# EAGLE board brd2sensores_ligabot (EAGLE 7.1.0)
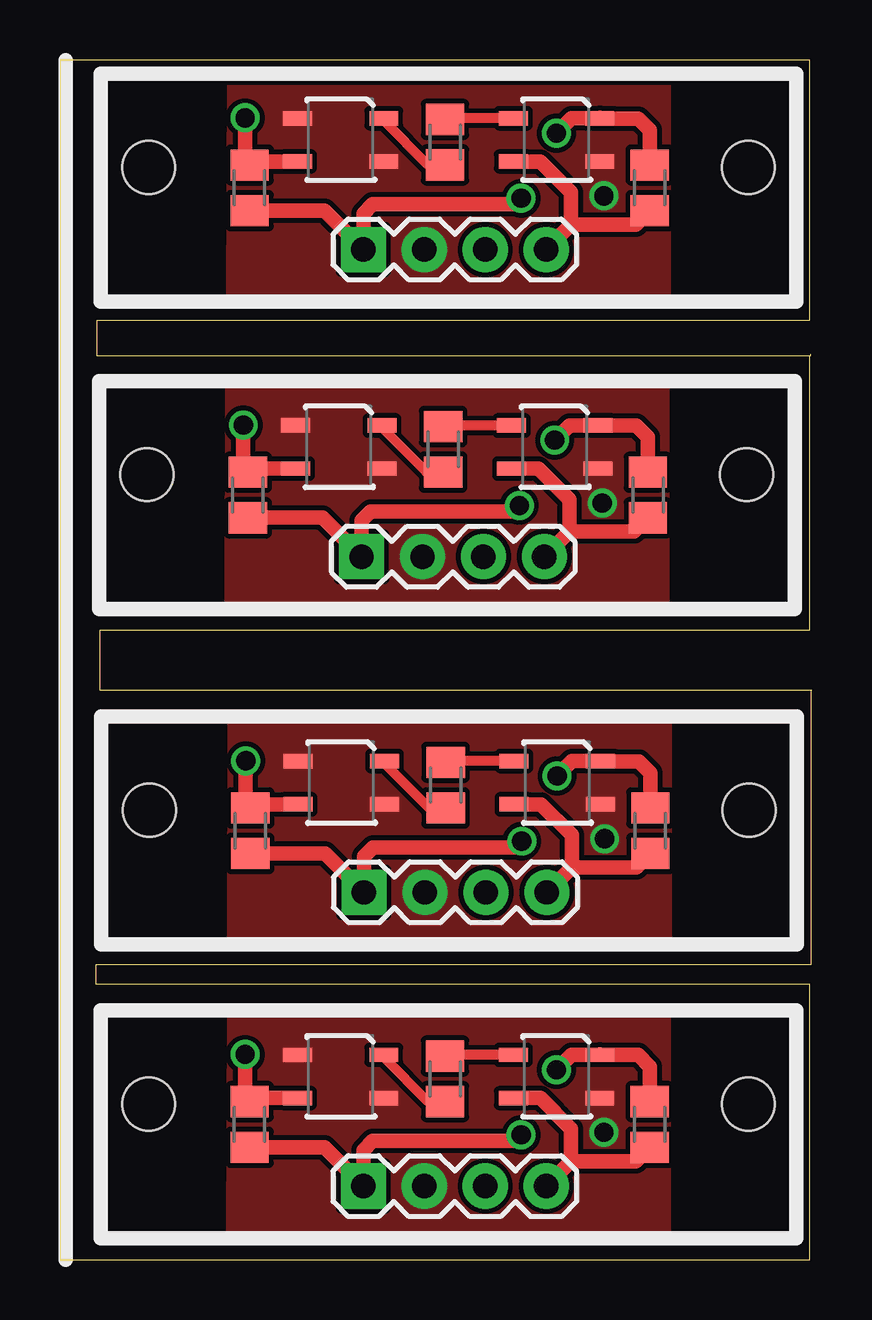
[diagram p0: board, top side]
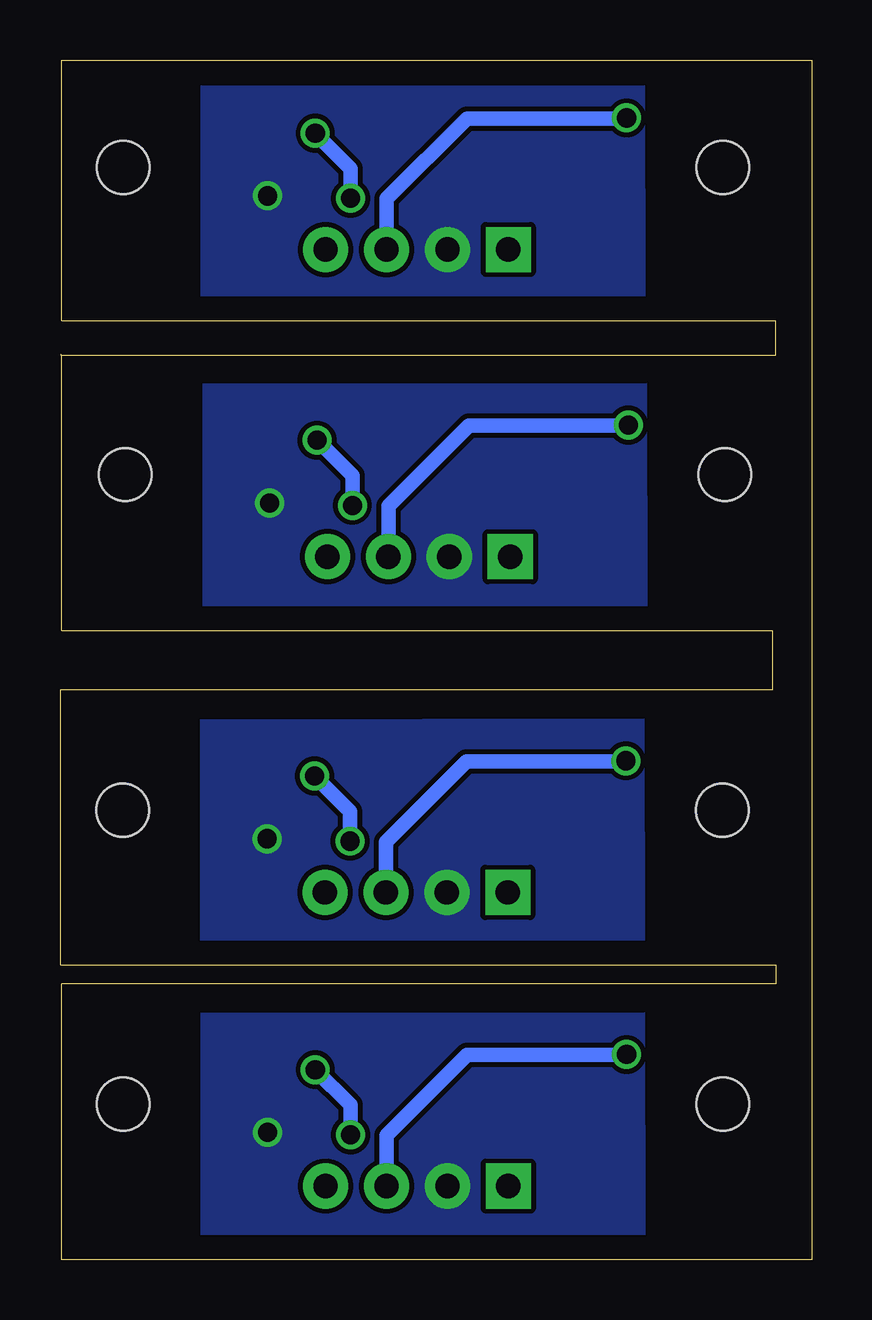
[diagram p1: board, bottom side, seen from below]

Size 31.34 x 50.01 mm. Coordinates in mm from the lower left corner, seen from the top.
Outline: 31.27,0 0,0 0,50 31.27,50
Outline: 31.27,0 31.27,0
Outline: 31.27,37.69 1.52,37.69 1.52,39.14 31.27,39.14 31.27,50.01
Outline: 31.27,37.69 31.29,37.69 31.29,37.74
Outline: 31.32,23.75 1.65,23.75 1.65,26.24 31.27,26.24 31.27,37.69
Outline: 31.32,23.75 31.34,23.75
Outline: 31.27,0 31.27,11.51 1.5,11.51 1.5,12.29 31.32,12.29 31.32,23.75
Copper layers (1*16): Top 0.035mm / dielectric 1.5mm / Bottom 0.035mm
Design rules "default": minimum track width 10mil, minimum drill 24mil, track to track 8mil, track to pad 8mil, pad to pad 8mil, via to via 8mil, smd to smd 8mil, copper to edge 40mil, drill to drill 8mil, minimum pad ring 10mil, minimum via ring 8mil, stop-mask expansion 4mil, vias tented up to drill 0mil, thermal gap 10mil
Holes 2.2 mm at 3.7,6.5 28.7,6.5 3.73,18.74 28.73,18.74 3.7,45.53 28.7,45.53 3.63,32.73 28.63,32.73

## Footprints (pad centres in the part's own frame; a part is rotated, then mirrored left to right if it is on the bottom)
1X04 = drill 1.016 pad 1.88 square: 1 0,0 | drill 1.016 pad 1.88: 2 2.54,0; 3 5.08,0; 4 7.62,0
M0805 = smd 1.3 x 1.6: 1 -0.95,0; 2 0.95,0
QRE1113 = smd 1.2 x 0.6: 1 -1.8,-0.9; 2 1.8,-0.9; 3 1.8,0.9; 4 -1.8,0.9

## Placement (x,y rotation side)
JP2  [1X04]  12.65,3.07 0 top
JP5  [1X04]  12.67,15.32 0 top
JP6  [1X04]  12.65,42.11 0 top
JP7  [1X04]  12.57,29.31 0 top
R6  [M0805]  24.59,5.64 90 top
R18  [M0805]  7.91,5.64 270 top
R19  [M0805]  24.61,17.89 90 top
R20  [M0805]  7.93,17.89 270 top
R21  47k  [M0805]  24.59,44.68 90 top
R22  47k  [M0805]  7.91,44.68 270 top
R23  [M0805]  24.51,31.88 90 top
R24  [M0805]  7.83,31.88 270 top
RP1  [M0805]  16.05,7.54 270 top
RP2  [M0805]  16.08,19.79 270 top
RP3  220R  [M0805]  16.05,46.58 270 top
RP4  [M0805]  15.98,33.78 270 top
U$4  QRE1113  [QRE1113]  11.7,7.64 180 top
U$5  QRE1113  [QRE1113]  20.7,7.64 180 top
U$6  QRE1113  [QRE1113]  20.73,19.89 180 top
U$7  QRE1113  [QRE1113]  11.73,19.89 180 top
U$8  QRE1113  [QRE1113]  20.7,46.68 180 top
U$9  QRE1113  [QRE1113]  11.7,46.68 180 top
U$10  QRE1113  [QRE1113]  20.63,33.88 180 top
U$11  QRE1113  [QRE1113]  11.63,33.88 180 top

## Library data of the parts
JP2 JP5-JP7 U$4-U$11 = SparkFun
R6 R18-R24 = resistor; SPICEPREFIX: R
RP1-RP4 = rcl

## Nets
GNDS1: JP2.2 U$4.2 U$4.4 U$5.4
GNDS2: JP5.2 U$6.4 U$7.2 U$7.4
GNDS3: JP6.2 U$8.4 U$9.2 U$9.4
GNDS4: JP7.2 U$10.4 U$11.2 U$11.4
N$7: RP2.2 U$7.1
N$10: RP1.2 U$4.1
N$11: RP1.1 U$5.2
N$12: RP2.1 U$6.2
N$13: RP3.2 U$9.1
N$14: RP3.1 U$8.2
N$15: RP4.2 U$11.1
N$16: RP4.1 U$10.2
S1: JP2.4 R6.1 U$5.3
S2: JP2.3 R18.1 U$4.3
S3: JP5.4 R19.1 U$6.3
S4: JP5.3 R20.1 U$7.3
S5: JP6.4 R21.1 U$8.3
S6: JP6.3 R22.1 U$9.3
S7: JP7.4 R23.1 U$10.3
S8: JP7.3 R24.1 U$11.3
VCCS1: JP2.1 R6.2 R18.2 U$5.1
VCCS2: JP5.1 R19.2 R20.2 U$6.1
VCCS3: JP6.1 R21.2 R22.2 U$8.1
VCCS4: JP7.1 R23.2 R24.2 U$10.1

## Tracks (layer width: path | path; a pad name or v marks a point on that pad's centre or on a via)
GNDS1  (via drill 0.8)
  other vias: 22.68,5.31
  pour Top (no thermals): 25.48,0.91 25.48,10.29 6.96,10.31 6.93,0.91
  pour Bottom (no thermals): 25.48,0.91 25.48,10.29 6.96,10.31 6.93,0.91
GNDS2  (via drill 0.8)
  other vias: 22.71,17.55
  pour Top (no thermals): 25.5,13.16 25.5,22.53 6.98,22.56 6.96,13.16
  pour Bottom (no thermals): 25.5,13.16 25.5,22.53 6.98,22.56 6.96,13.16
GNDS3  (via drill 0.8)
  other vias: 22.68,44.35
  pour Top (no thermals): 25.48,39.95 25.48,49.33 6.96,49.35 6.93,39.95
  pour Bottom (no thermals): 25.48,39.95 25.48,49.33 6.96,49.35 6.93,39.95
GNDS4  (via drill 0.8)
  other vias: 22.61,31.55
  pour Top (no thermals): 25.4,27.15 25.4,36.53 6.88,36.55 6.86,27.15
  pour Bottom (no thermals): 25.4,27.15 25.4,36.53 6.88,36.55 6.86,27.15
N$7
  Top 0.406: RP2.2 15.38,18.84 13.53,20.69 U$7.1
N$10
  Top 0.406: RP1.2 15.35,6.59 13.5,8.44 U$4.1
N$11
  Top 0.406: U$5.2 16.1,8.54 RP1.1
N$12
  Top 0.406: U$6.2 16.13,20.79 RP2.1
N$13
  Top 0.406: RP3.2 15.35,45.63 13.5,47.48 U$9.1
N$14
  Top 0.406: U$8.2 16.1,47.58 RP3.1
N$15
  Top 0.406: RP4.2 15.28,32.83 13.43,34.68 U$11.1
N$16
  Top 0.406: U$10.2 16.03,34.78 RP4.1
S1
  Top 0.61: JP2.4 21.31,4.12 | U$5.3 20.03,6.74 21.31,5.46 21.31,4.12 | R6.1 24.01,4.12 21.31,4.12
S2  (via drill 0.8)
  Top 0.61: U$4.3 7.85,6.74 R18.1 7.72,6.61 v7.72,8.56
  Bottom 0.61: JP2.3 17.73,5.18 14.38,8.53 7.75,8.53 v7.72,8.56
S3
  Top 0.61: JP5.4 21.34,16.36 | U$6.3 20.05,18.99 21.34,17.7 21.34,16.36 | R19.1 24.04,16.36 21.34,16.36
S4  (via drill 0.8)
  Top 0.61: U$7.3 7.88,18.99 R20.1 7.75,18.86 v7.75,20.8
  Bottom 0.61: JP5.3 17.75,17.42 14.4,20.78 7.77,20.78 v7.75,20.8
S5
  Top 0.61: JP6.4 21.31,43.16 | U$8.3 20.03,45.78 21.31,44.5 21.31,43.16 | 21.31,43.16 | R21.1 24.01,43.16 21.31,43.16
S6  (via drill 0.8)
  Top 0.61: U$9.3 7.85,45.78 R22.1 7.72,45.65 v7.72,47.6
  Bottom 0.61: JP6.3 17.73,44.22 14.38,47.57 7.75,47.57 v7.72,47.6
S7
  Top 0.61: JP7.4 21.23,30.35 | U$10.3 19.95,32.98 21.23,31.7 21.23,30.35 | R23.1 23.93,30.35 21.23,30.35
S8  (via drill 0.8)
  Top 0.61: U$11.3 7.78,32.98 R24.1 7.65,32.85 v7.65,34.8
  Bottom 0.61: JP7.3 17.65,31.42 14.3,34.77 7.67,34.77 v7.65,34.8
VCCS1  (via drill 0.8)
  Top 0.61: R18.2 11.03,4.69 JP2.1 12.65,4.57 13.03,4.95 18.97,4.95 v19.23,5.21 | 22.52,8.56 U$5.1 | v20.7,7.92 21.32,8.54 U$5.1 | R6.2 24.59,8.05 24.1,8.53 22.51,8.53 U$5.1
  Bottom 0.61: v19.23,5.21 19.23,6.45 v20.7,7.92
VCCS2  (via drill 0.8)
  Top 0.61: R20.2 11.06,16.94 JP5.1 12.67,16.82 13.06,17.2 19,17.2 v19.25,17.45 | 22.54,20.8 U$6.1 | v20.73,20.17 21.34,20.79 U$6.1 | R19.2 24.61,20.29 24.13,20.78 22.54,20.78 U$6.1
  Bottom 0.61: v19.25,17.45 19.25,18.69 v20.73,20.17
VCCS3  (via drill 0.8)
  Top 0.61: R22.2 11.03,43.73 JP6.1 12.65,43.61 13.03,43.99 18.97,43.99 v19.23,44.25 | 22.52,47.6 U$8.1 | v20.7,46.97 21.32,47.58 U$8.1 | R21.2 24.59,47.09 24.1,47.57 22.51,47.57 U$8.1
  Bottom 0.61: v19.23,44.25 19.23,45.49 v20.7,46.97
VCCS4  (via drill 0.8)
  Top 0.61: R24.2 10.95,30.93 JP7.1 12.57,30.81 12.95,31.19 18.9,31.19 v19.15,31.45 | 22.44,34.8 U$10.1 | v20.62,34.16 21.24,34.78 U$10.1 | R23.2 24.51,34.29 24.03,34.77 U$10.1
  Bottom 0.61: v19.15,31.45 19.15,32.69 v20.62,34.16